# Altium PCB IPG_Rigid.PcbDoc (part 3 of 13)
Units mm, origin at the board's own origin, x right, y up, seen from the top; angles counter-clockwise.
Board outline 69.6 x 90.73 mm, 10 copper layers (TOP, DHOR, DVERT, GND 1, POWER, GND 2, GND 3, AVERT, AHOR, BOT), stack 1.198 mm thick; 745 components, 398 nets, 1997 pads, 2678 vias.
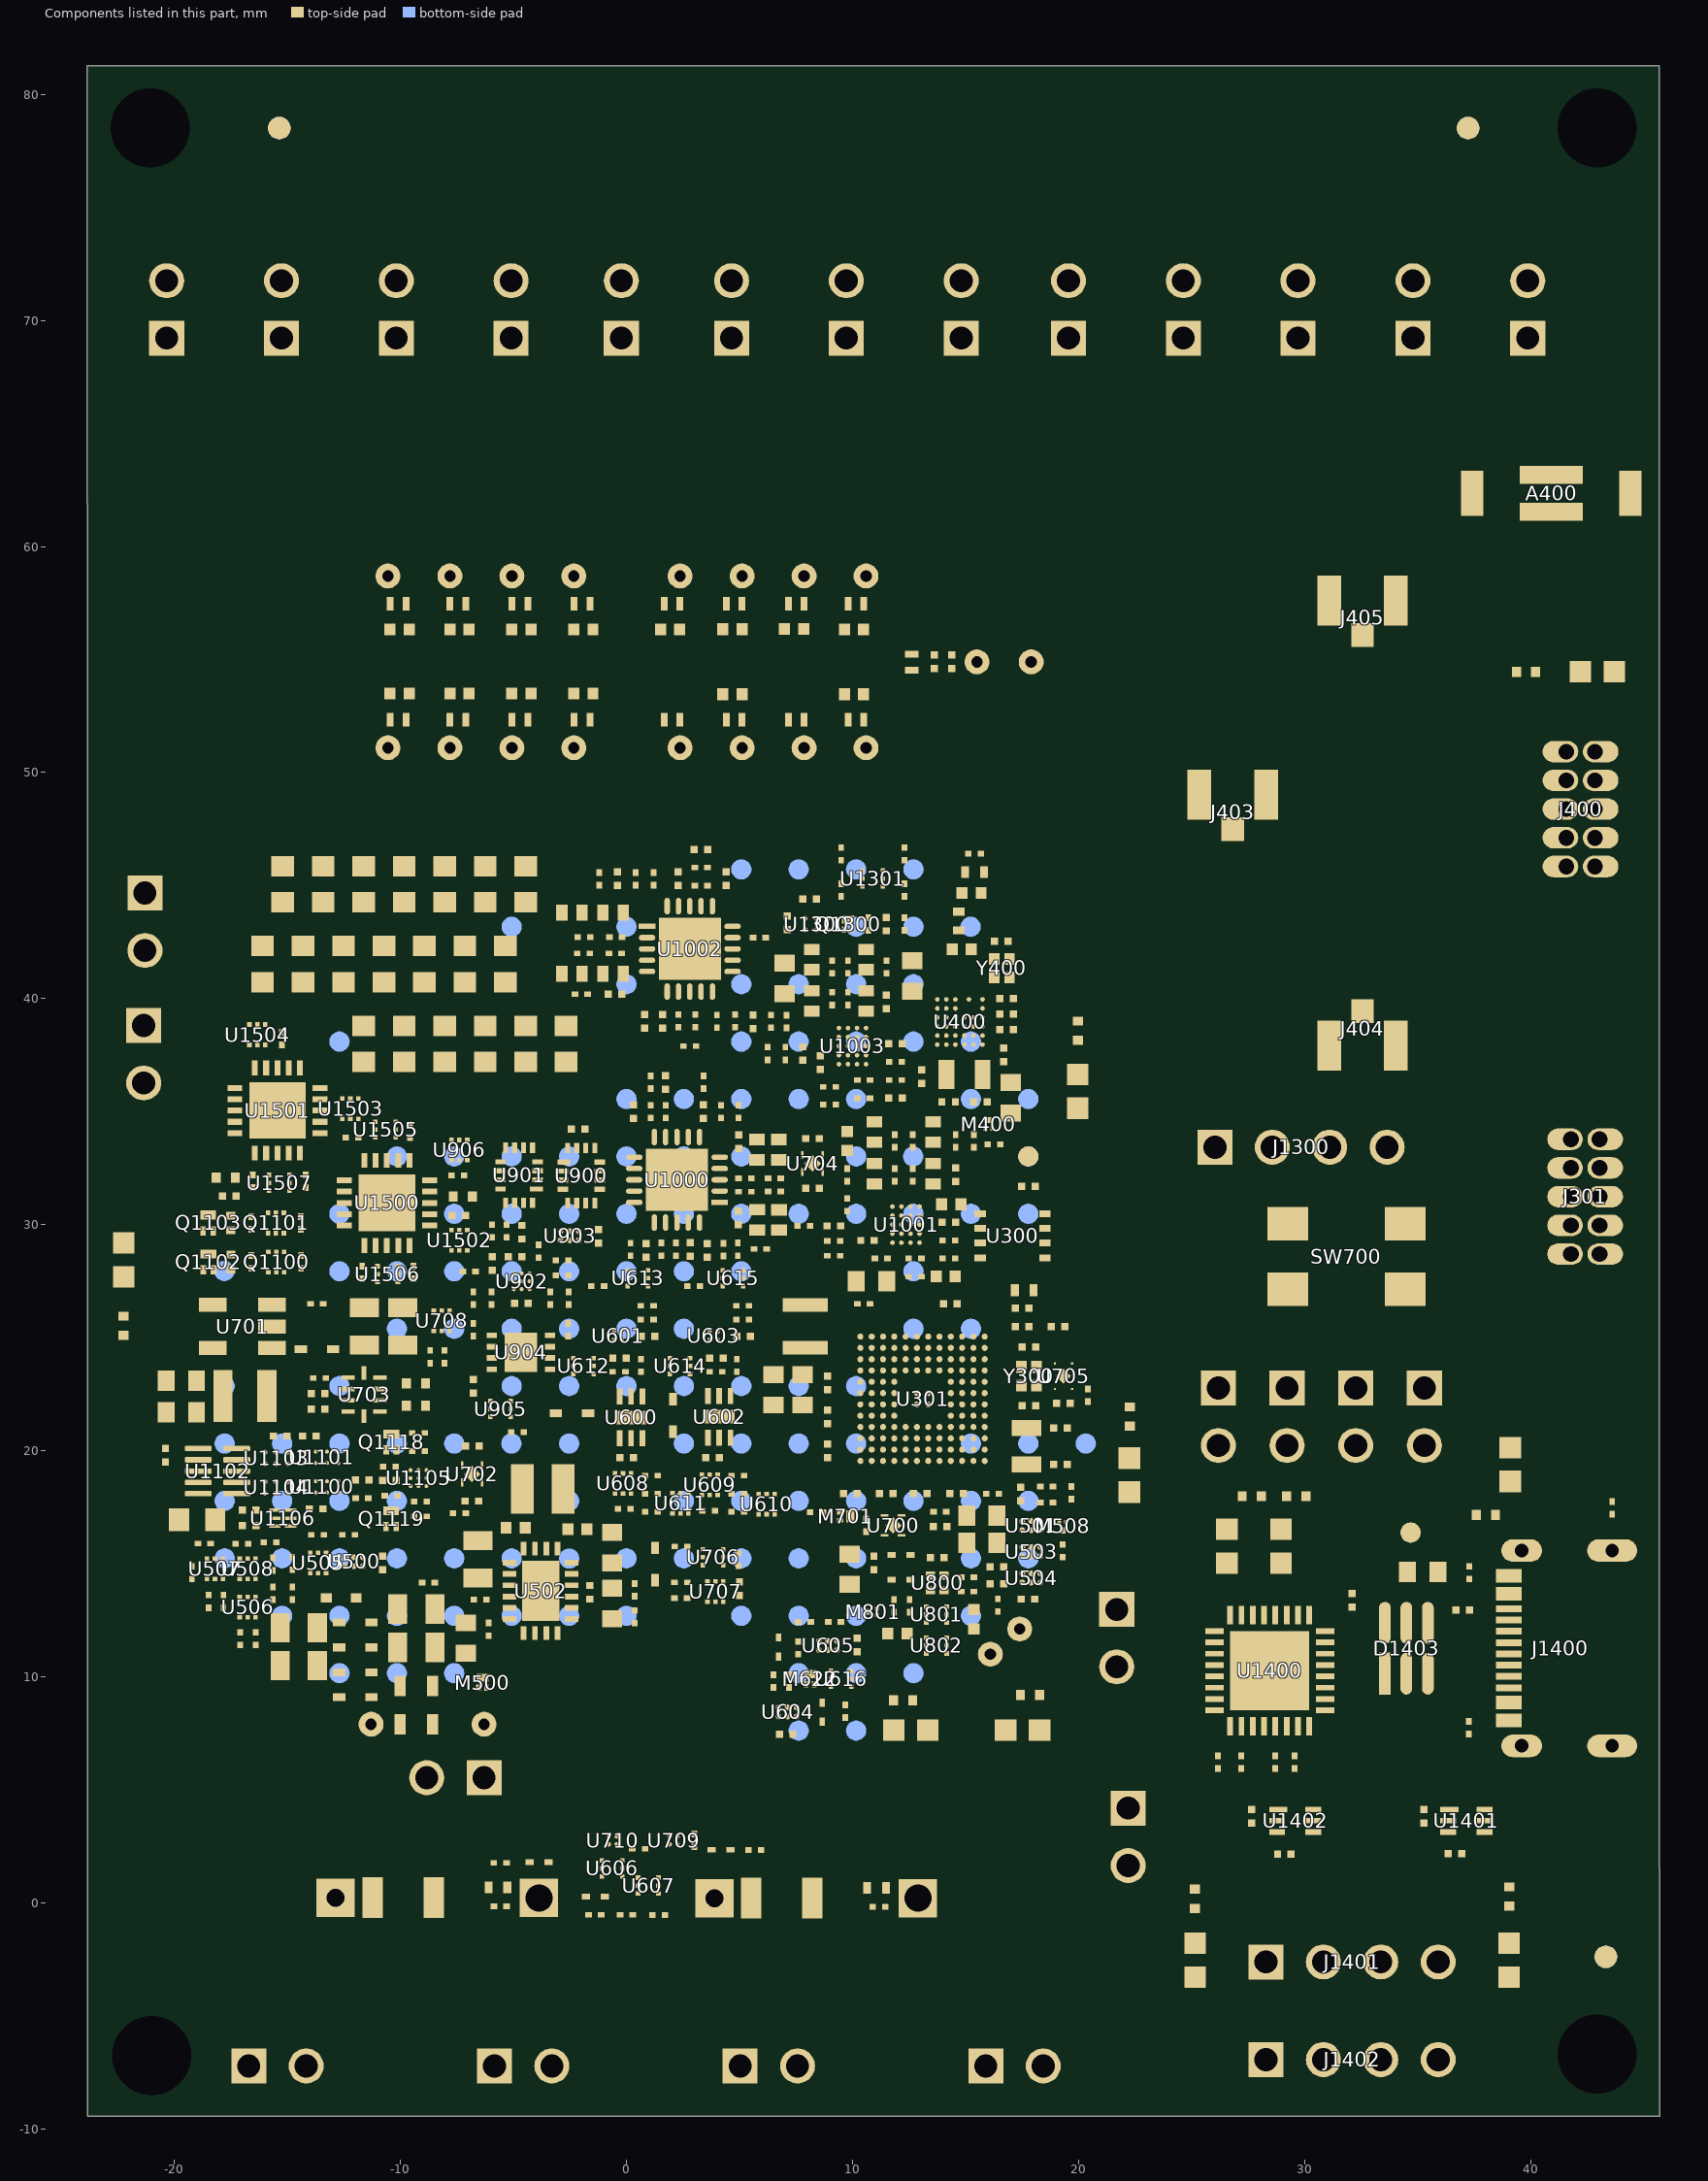
[diagram p10: the components of this part, seen from the top]

## Part data (continued)
C409: "Ceramic Capacitor, Multilayer, Ceramic, 25V, 10% +Tol, 10% -Tol, X7R, 15% TC, 0.0001uF, Surface Mount, 0201", Capacitor Type=Ceramic, Case/Package=0201, Manufacturer=Murata, Max Operating Temperature=125°C, Min Operating Temperature=-55°C, Package Shape=Rectangular, Package Style=SMTMeter, Rated DC Voltage (URdc)=25V, Supplier Part Number=490-3172-1-ND, Temperature Characteristics Code=X7R, Tolerance  (fill in as +-)=10%, Category="Ceramic Capacitors", ComponentLink1Description=https://psearch.en.murata.com:443/capacitor/product/GRM033R71E101KA01%23.pdf?src-supplier=IHS+Markit, ComponentLink1URL=https://psearch.en.murata.com:443/capacitor/product/GRM033R71E101KA01%23.pdf?src-supplier=IHS+Markit, ComponentLink2Description=https://datasheet.ciiva.com/129/grm033r71e101ka01-01-129915.pdf?src-supplier=Digikey, ComponentLink2URL=https://datasheet.ciiva.com/129/grm033r71e101ka01-01-129915.pdf?src-supplier=Digikey, ComponentLink3Description=https://datasheet.ciiva.com/129/grm033r71e101ka01-01-129916.pdf?src-supplier=Digikey, ComponentLink3URL=https://datasheet.ciiva.com/129/grm033r71e101ka01-01-129916.pdf?src-supplier=Digikey, ComponentLink4Description=https://datasheet.ciiva.com/129/grm033r71e101ka01-01-129917.pdf?src-supplier=Digikey, ComponentLink4URL=https://datasheet.ciiva.com/129/grm033r71e101ka01-01-129917.pdf?src-supplier=Digikey, ComponentLink5Description=https://datasheet.ciiva.com/18184/getdatasheetpartid-228478-18184102.pdf?src-supplier=Verical, ComponentLink5URL=https://datasheet.ciiva.com/18184/getdatasheetpartid-228478-18184102.pdf?src-supplier=Verical, ComponentLink6Description=https://datasheet.ciiva.com/29199/455792-da-01-en-vs-kondensator-0201-29199171.pdf?src-supplier=Conrad, ComponentLink6URL=https://datasheet.ciiva.com/29199/455792-da-01-en-vs-kondensator-0201-29199171.pdf?src-supplier=Conrad, ComponentLink7Description=https://datasheet.ciiva.com/11605/product-11605541.pdf?src-supplier=Avnet, ComponentLink7URL=https://datasheet.ciiva.com/11605/product-11605541.pdf?src-supplier=Avnet, ComponentLink8Description=https://datasheet.ciiva.com/16370/product-16370826.pdf?src-supplier=Future+Electronics, ComponentLink8URL=https://datasheet.ciiva.com/16370/product-16370826.pdf?src-supplier=Future+Electronics, Dielectric Material=Ceramic, Height=0.3mm, JESD-609 Code=e3, Length=0.6mm, Manufacturer Part Number=GRM033R71E101KA01D, Mounting Technology="Surface Mount", Multilayer=Yes, Packaging="Tape and Reel", Pins=2, Pricing="1=0,1, 10=0,01, 50=0,0056, 100=0,0043, 500=0,00324, 1000=0,00255, 2500=0,00232, 5000=0,00213 (USD)", Reach SVHC Compliant=Yes, RoHS=Yes, RoHS Compliant=Yes, Stock=605708, Supplier=Digikey, Supplier 1="Arrow Electronics", Supplier Part Number 1=GRM033R71E101KA01D, Terminal Finish=Nickel, Termination=Wraparound, Tolerance (fill in as +-)=10%, Width=0.3mm
C500 C501: "Capacitor, 27nF, C0G, 100VDC, 2%, 0805, Implant-grade", Dielectric=C0G, Manufacturer=Murata, Medical Grade Manufacturer=TBD, Supplier Part Number=0.85mm, Supplier Part Number 1=81-GRM2195C2A273GE1D, Temperature Coefficient=-, Tolerance=2%, Voltage Rating=100V, Category=Capacitor, Height=1.25mm, Length=2mm, Manufacturer Part Number=GRM2195C2A273GE01D, Medical Grade Manufacturer Part Number=TBD, Size Code="Size Code", Supplier=TBD, Supplier 1=Mouser, Supplier 2=Digikey, Supplier 3=Digikey, Supplier 4=Digikey, Supplier Part Number 2=490-GRM2195C2A273GE01DCT-ND, Supplier Part Number 3=490-GRM2195C2A273GE01DDKR-ND, Supplier Part Number 4=490-GRM2195C2A273GE01DTR-ND, Width=1.25mm
C502 C503: "Capacitor, 4.7nF, C0G, 25V, 1%, 0603, Implant-grade", Dielectric=C0G, Manufacturer=KEMET, Medical Grade Manufacturer=TBD, Supplier Part Number=-, Supplier Part Number 1=80-C0603C472F3GEC, Tolerance=1%, Voltage Rating=25V, Category=Capacitor, Height=0.78mm, Length=2mm, Manufacturer Part Number=C0603C472F3GECTU, Medical Grade Manufacturer Part Number=TBD, Size Code=0805, Supplier=-, Supplier 1=Mouser, Temperature Coefficient=-, Width=1.25mm
C504 C505 C511 C703 C704: "Capacitor, 4.7uF, X7S, 35V, 10%, 0805, Implant-grade", Manufacturer=Murata, Medical Grade MFR PN=GCH21BC7YA475KE11, Package Description=0805, Rating=35V, Category=Capacitor, Length (mm)="2.00 ±0.20", Manufacturer Part Number=GCM21BC7YA475KE36L, Medical Grade MFR=Murata, PCB Footprint=cap0805_reduced, Review=020823, Status=Approved, Supplier 1="Arrow Electronics", Supplier Part Number 1=GCM21BC7YA475KE36L, Thickness (mm)="1.25 ±0.20", Width (mm)="1.25 ±0.20"
C506 C507: "Capacitor, 0.022uF, X7R, 50V, 10%, 0402, Implant-grade", Manufacturer=Murata, Medical Grade MFR PN=GCH155R71H223KE01, Package Description=0402, Rating=50V, Category=Capacitor, Length (mm)="1.00 ±0.05", Manufacturer Part Number=GCM155R71H223KA55D, Medical Grade MFR=Murata, PCB Footprint=cap0402_reduced, Review=020823, Status=Approved, Supplier 1="Arrow Electronics", Supplier Part Number 1=GCM155R71H223KA55D, Thickness (mm)="0.50 ±0.05", Width (mm)="0.50 ±0.05"
C513 C1011 C1027: "Ceramic Capacitor, Multilayer, Ceramic, 25V, 5% +Tol, 5% -Tol, C0G, 30ppm/Cel TC, 0.000033uF, Surface Mount, 0201", Capacitor Type=Ceramic, Case/Package=0201, Manufacturer=Murata, Max Operating Temperature=125°C, Min Operating Temperature=-55°C, Package Shape=Rectangular, Package Style=SMTMeter, Rated DC Voltage (URdc)=25V, Supplier Part Number=490-10678-1-ND, Temperature Characteristics Code=C0G, Tolerance  (fill in as +-)=5%, Category="Ceramic Capacitors", ComponentLink1Description=https://datasheet.ciiva.com:443/pdfs/VipMasterIC/IC/MURE/MURE-S-A0004347008/MURE-S-A0004347461-1.pdf?src-supplier=IHS+Markit, ComponentLink1URL=https://datasheet.ciiva.com:443/pdfs/VipMasterIC/IC/MURE/MURE-S-A0004347008/MURE-S-A0004347461-1.pdf?src-supplier=IHS+Markit, ComponentLink2Description=https://datasheet.ciiva.com/29538/partnumbering-e-01-29538933.pdf?src-supplier=Digikey, ComponentLink2URL=https://datasheet.ciiva.com/29538/partnumbering-e-01-29538933.pdf?src-supplier=Digikey, Dielectric Material=Ceramic, Height=0.3mm, JESD-609 Code=e3, Length=0.6mm, Manufacturer Part Number=GRM0335C1E330JA01D, Mounting Technology="Surface Mount", Multilayer=Yes, Packaging="Tape and Reel", Pins=2, Pricing="1=0,1, 10=0,011, 50=0,0062, 100=0,0048, 500=0,0036, 1000=0,00283, 2500=0,00258, 5000=0,00237 (USD)", Reach SVHC Compliant=Yes, RoHS=Yes, RoHS Compliant=Yes, Stock=355128, Supplier=Digikey, Supplier 1="Arrow Electronics", Supplier Part Number 1=GRM0335C1E330JA01D, Terminal Finish=Nickel, Termination=Wraparound, Tolerance (fill in as +-)=5%, Width=0.3mm